# Altium PCB PCB.PcbDoc
Units mil, origin at the board's own origin, x right, y up, seen from the top; angles counter-clockwise.
Board outline 3610 x 3950 mil, 2 copper layers (Top Layer, Bottom Layer); 18 components, 15 nets, 258 pads, 0 vias.
Unrouted connection lines stored in the file: 2.
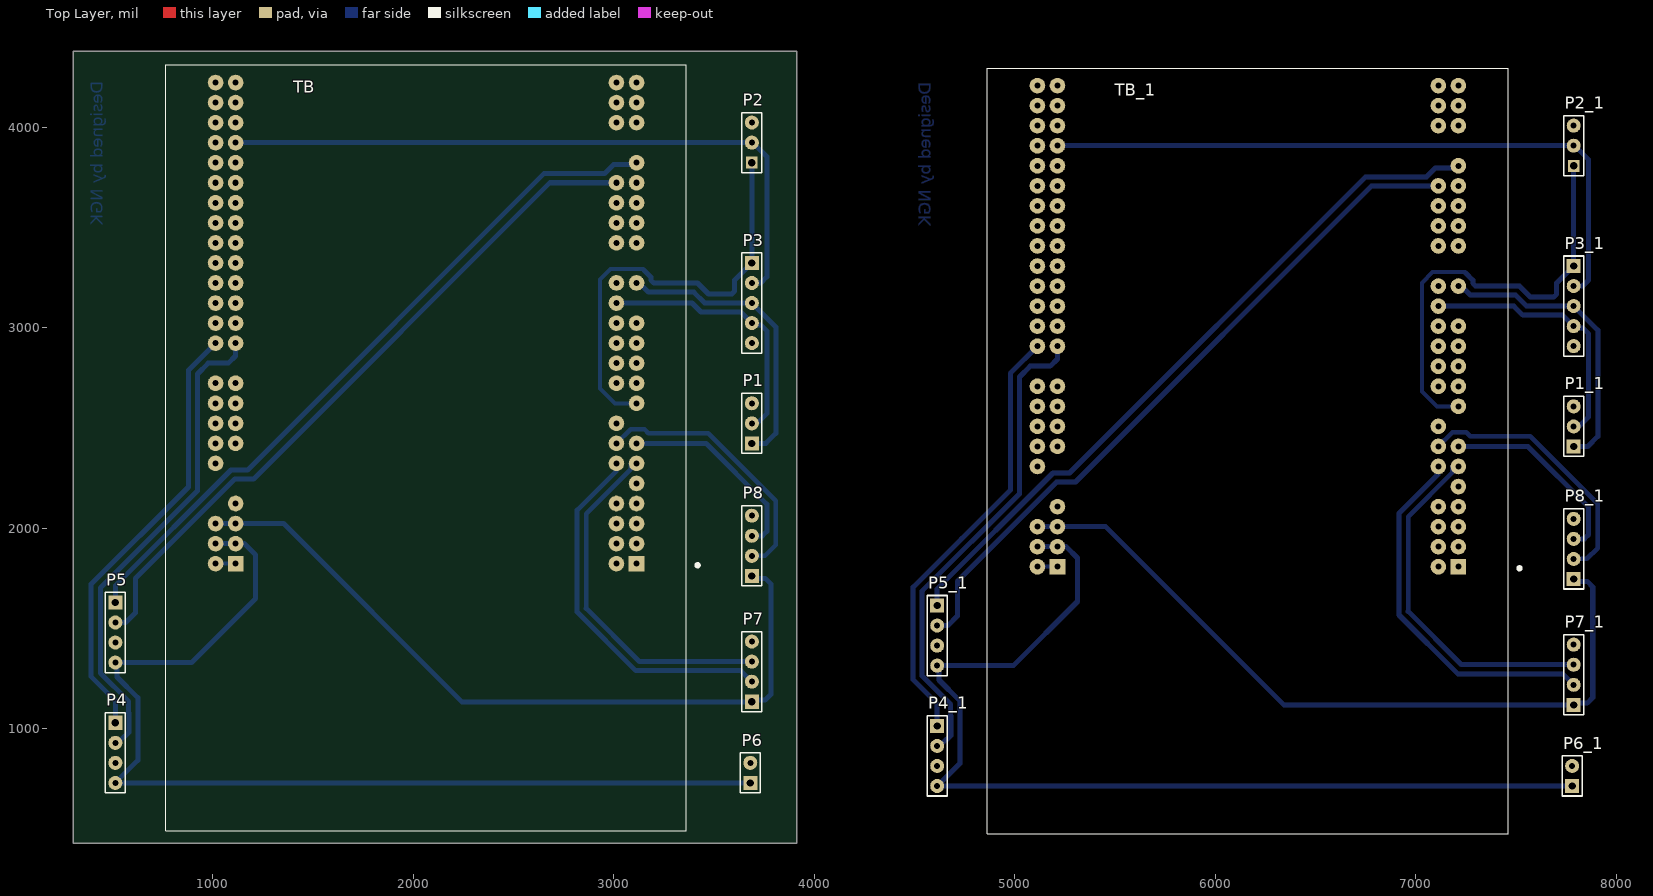
[diagram p0: Top Layer view]
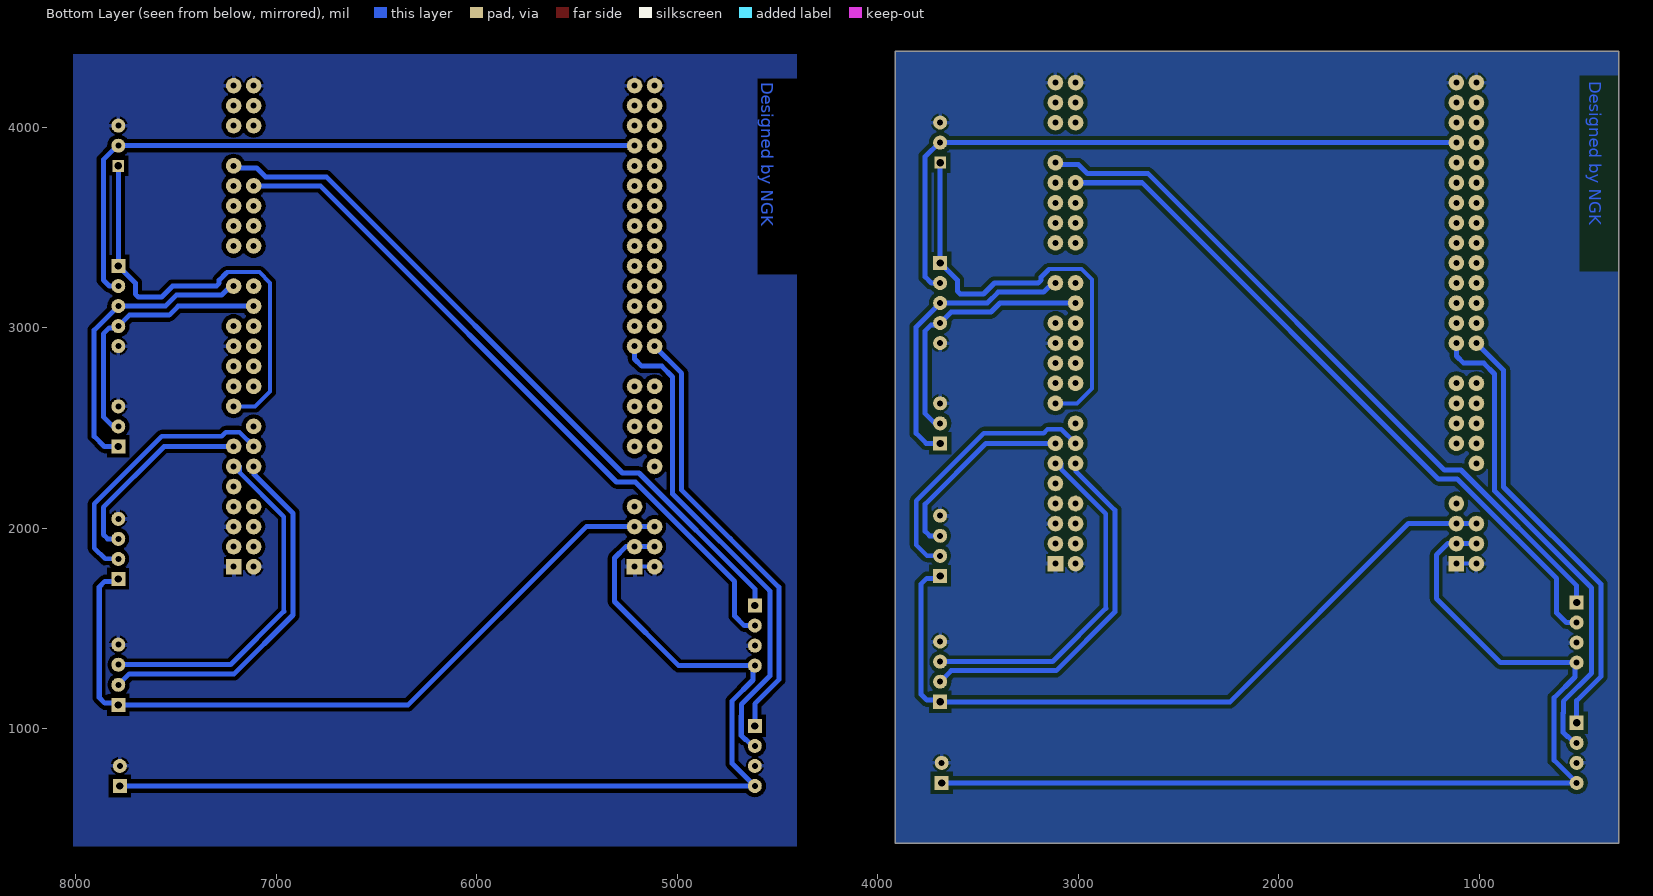
[diagram p1: Bottom Layer view, seen from below]

## Layer stack, top to bottom
Top Solder: solder mask 0.4, Solder Resist, Dk 3.5
Top Layer: signal copper 1.4
Dielectric 1: dielectric 12.6, FR-4, Dk 4.8
Bottom Layer: signal copper 1.4
Bottom Solder: solder mask 0.4, Solder Resist, Dk 3.5

## Board outline
303.18,430 303.18,4380 3913.18,4380 3913.18,430

## Design rules (kind name [scope] priority, off if disabled: settings)
Clearance [All] p1: gap=20 ignorepadtopadclearanceinfootprint=FALSE
PolygonConnect PolygonConnect_1 [All vs IsNamedPolygon('Bottom Layer-GND')] p1: thpad.connectstyle=Relief thpad.reliefconductorwidth=20 thpad.reliefentries=4 thpad.polygonreliefangle="90 Angle" thpad.airgapwidth=10 smdpad.connectstyle=Relief smdpad.reliefconductorwidth=10 smdpad.reliefentries=4 smdpad.polygonreliefangle="90 Angle" smdpad.airgapwidth=10 via.connectstyle=Relief via.reliefconductorwidth=10 via.reliefentries=4 via.polygonreliefangle="90 Angle" via.airgapwidth=10
PolygonConnect [All] p2: connectstyle=Relief reliefconductorwidth=10 reliefentries=4 polygonreliefangle="90 Angle" airgapwidth=10
RoutingVias [All] p1: holewidth=28 width=50 viastyle="Through Hole" minholewidth=28 minwidth=50 maxholewidth=28 maxwidth=50
SolderMaskExpansion [All] p1: expansion=4
Width [All] p1: maxlimit=50 minlimit=10 preferedwidth=25
30 further rules are at their usual default settings.

## Components (designator, comment, footprint, x,y, rotation, side; value= is the part's Value field where it differs from the comment)
P1 "PWM2" HDR1X3#1 3688.24,2423.76 r90 top
P1_1 "PWM2" HDR1X3#1 7788.24,2408.43 r90 top (schematic designator P1)
P2 "PWM1" HDR1X3#2 3688.24,3823.76 r90 top
P2_1 "PWM1" HDR1X3#2 7788.24,3808.43 r90 top (schematic designator P2)
P3 "PWM" HDR1X5 3688.24,3323.76 r270 top
P3_1 "PWM" HDR1X5 7788.24,3308.43 r270 top (schematic designator P3)
P4 "UART" HDR1X4 513.18,1030 r270 top
P4_1 "UART" HDR1X4 4613.18,1014.67 r270 top (schematic designator P4)
P5 "UART" HDR1X4 513.18,1630 r270 top
P5_1 "UART" HDR1X4 4613.18,1614.67 r270 top (schematic designator P5)
P6 "Header 2" HDR1X2 3680.71,730 r90 top
P6_1 "Header 2" HDR1X2 7780.71,714.67 r90 top (schematic designator P6)
P7 "ENCODER2" HDR1X4 3688.24,1134.76 r90 top
P7_1 "ENCODER2" HDR1X4 7788.24,1119.43 r90 top (schematic designator P7)
P8 "ENCODER1" HDR1X4 3688.24,1762.76 r90 top
P8_1 "ENCODER1" HDR1X4 7788.24,1747.43 r90 top (schematic designator P8)
TB "STM32F4DISCOVERY" MODULE_STM32F4DISCOVERY 2063.18,2401.71 r180 top
TB_1 "STM32F4DISCOVERY" MODULE_STM32F4DISCOVERY 6163.18,2386.39 r180 top (schematic designator TB)

## Footprints (in the part's own frame and the unit in brackets; to place one, negate y for a bottom-side part, rotate by r counter-clockwise, add the part's x,y. Pads: shape width x height; smd on the part's side, far side on the other; paste and mask are expansions set on the pad)
HDR1X2 [mil] "Connector; Header; 2 Position"
  rect 70x70 hole 35.43: 1(0,0)
  round 70 hole 30: 2(100,0)
  silkscreen extent -50,-50 150,50
HDR1X3#1 [mil] "Connector; Header; 3 Position"
  rect 70x70 hole 35.43: 1(0,0)
  round 70 hole 30: 2(100,0) 3(200,0)
  silkscreen extent -50,-50 250,50
HDR1X3#2 [mil] "Connector; Header; 3 Position"
  rect 60x59.06 hole 35.43: 1(0,0)
  round 70 hole 30: 2(100,0) 3(200,0)
  silkscreen extent -50,-50 250,50
HDR1X4 [mil] "Connector; Header; 4 Position"
  rect 70x70 hole 35.43: 1(0,0)
  round 70 hole 30: 2(100,0) 3(200,0) 4(300,0)
  silkscreen extent -50,-50 350,50
HDR1X5 [mil] "Connector; Header; 5 Position"
  rect 70x70 hole 35.43: 1(0,0)
  round 70 hole 30: 2(100,0) 3(200,0) 4(300,0) 5(400,0)
  silkscreen extent -50,-50 450,50
MODULE_STM32F4DISCOVERY [mil]
  rect 78x78 hole 30: P1_1(-1050,577.95) P2_1(950,577.95)
  round 78 hole 30: P1_2(-950,577.95) P1_3(-1050,477.95) P1_4(-950,477.95) P1_5(-1050,377.95) P1_6(-950,377.95) P1_7(-1050,277.95) P1_8(-950,277.95) P1_9(-1050,177.95) P1_11(-1050,77.95) P1_12(-950,77.95) P1_13(-1050,-22.05) P1_14(-950,-22.05) P1_16(-950,-122.05) P1_17(-1050,-222.05) P1_19(-1050,-322.05) P1_20(-950,-322.05) P1_21(-1050,-422.05) P1_22(-950,-422.05) P1_23(-1050,-522.05) P1_24(-950,-522.05) P1_25(-1050,-622.05) P1_26(-950,-622.05) P1_28(-950,-722.05) P1_29(-1050,-822.05) P1_30(-950,-822.05) P1_33(-1050,-1022.05) P1_34(-950,-1022.05) P1_35(-1050,-1122.05) P1_36(-950,-1122.05) P1_37(-1050,-1222.05) P1_38(-950,-1222.05) P1_39(-1050,-1322.05) P1_40(-950,-1322.05) P1_41(-1050,-1422.05) P1_45(-1050,-1622.05) P1_46(-950,-1622.05) P1_47(-1050,-1722.05) P1_48(-950,-1722.05) P1_49(-1050,-1822.05) P1_50(-950,-1822.05) P2_2(1050,577.95) P2_3(950,477.95) P2_4(1050,477.95) P2_5(950,377.95) P2_6(1050,377.95) P2_7(950,277.95) P2_12(1050,77.95) P2_13(950,-22.05) P2_14(1050,-22.05) P2_15(950,-122.05) P2_16(1050,-122.05) P2_17(950,-222.05) P2_18(1050,-222.05) P2_19(950,-322.05) P2_20(1050,-322.05) P2_23(950,-522.05) P2_24(1050,-522.05) P2_25(950,-622.05) P2_26(1050,-622.05) P2_27(950,-722.05) P2_28(1050,-722.05) P2_29(950,-822.05) P2_30(1050,-822.05) P2_31(950,-922.05) P2_32(1050,-922.05) P2_33(950,-1022.05) P2_34(1050,-1022.05) P2_35(950,-1122.05) P2_36(1050,-1122.05) P2_37(950,-1222.05) P2_38(1050,-1222.05) P2_39(950,-1322.05) P2_40(1050,-1322.05) P2_41(950,-1422.05) P2_42(1050,-1422.05) P2_43(950,-1522.05) P2_44(1050,-1522.05) P2_45(950,-1622.05) P2_46(1050,-1622.05) P2_47(950,-1722.05) P2_48(1050,-1722.05) P2_49(950,-1822.05) P2_50(1050,-1822.05)
  round 0 all layers, no hole: P1_10(-950,177.95) P1_15(-1050,-122.05) P1_18(-950,-222.05) P1_27(-1050,-722.05) P1_31(-1050,-922.05) P1_32(-950,-922.05) P1_42(-950,-1422.05) P1_43(-1050,-1522.05) P1_44(-950,-1522.05) P2_8(1050,277.95) P2_9(950,177.95) P2_10(1050,177.95) P2_11(950,77.95) P2_21(950,-422.05) P2_22(1050,-422.05)
  silkscreen extent -1363,-1909 1299,1909

## Part data
P1 P1_1 P2 P2_1: library part "Header 3", "Header, 3-Pin", LatestRevisionDate=17-Jul-2002, LatestRevisionNote="Re-released for DXP Platform.", Publisher="Altium Limited"
P3 P3_1: library part "Header 5", "Header, 5-Pin", LatestRevisionDate=17-Jul-2002, LatestRevisionNote="Re-released for DXP Platform.", Publisher="Altium Limited"
P4 P4_1 P5 P5_1 P7 P7_1 P8 P8_1: library part "Header 4", "Header, 4-Pin", LatestRevisionDate=17-Jul-2002, LatestRevisionNote="Re-released for DXP Platform.", Publisher="Altium Limited"
P6 P6_1: "Header, 2-Pin", LatestRevisionDate=17-Jul-2002, LatestRevisionNote="Re-released for DXP Platform.", Publisher="Altium Limited"
TB TB_1: "STM32F407VGT6 Discovery STM32F4 ARM® Cortex®-M4 MCU 32-Bit Embedded Evaluation Board", Package=None, Availability=Unavailable, MF=STMicroelectronics, MP=STM32F4DISCOVERY, Price=None, SnapEDA_Link=https://www.snapeda.com/parts/STM32F4DISCOVERY/STMicroelectronics/view-part/46335/?ref=snap

## Nets (pads, with @x,y where several pads share a name; then routed paths per layer and width w, separated by ;. In a path a pad name is that pad's centre, name@x,y a point inside that pad or via, vN(x,y) a via of type N, cw(c..) or ccw(c..) an arc to the next point about the centre after c; other vN are vias at no path point)
3V3: P7.1 P8.1 TB.P2_5 TB.P2_6 | length 3816.5
  Bottom Layer w25: TB.P2_6 TB.P2_5 1353.18,2023.76 2242.18,1134.76 P7.1 3696.57,1143.09 3755.27,1143.09 3783.18,1171 3783.18,1722.76 3755.27,1750.67 3700.33,1750.67 P8.1
5V: P4.4 P5.4 P6.1 TB.P2_3 TB.P2_4 | length 5133.6
  Bottom Layer w25: TB.P2_4 TB.P2_3 1156.18,1923.76 1213.18,1866.76 1213.18,1650 893.18,1330 P5.4 521.79,1321.39 521.79,1258.67 625.68,1154.78 625.68,842.5 P4.4 P6.1
GND: P1.3 P2.3 P3.5 P4.3 P5.3 P6.2 P7.4 P8.4 TB.P1_1 TB.P1_2 TB.P1_5 TB.P1_23 TB.P1_49 TB.P1_50 TB.P2_1 TB.P2_2 TB.P2_49 TB.P2_50 | length 100
  Bottom Layer w20: TB.P2_2 TB.P2_1
PA0: P7.2 TB.P1_12 | length 1837.6
  Bottom Layer w25: TB.P1_12 3011.42,2322 3011.42,2284.52 2817.18,2090.28 2817.18,1582.46 3109.88,1289.76 3633.24,1289.76 P7.2
PA1: P7.3 TB.P1_11 | length 1780.3
  Bottom Layer w23: 2862.18,1601.1 2862.18,2073.06 3083.68,2294.56 3083.68,2323.76 TB.P1_11
  Bottom Layer w25: 2862.18,1601.1 3128.52,1334.76 P7.3
PA2: P8.2 TB.P1_14 | length 1334.8
  Bottom Layer w23: TB.P1_14 3083.68,2494.26 3152.87,2494.26 3172.56,2474.57 3470.84,2474.57 3808.18,2137.23 3808.18,1916.83 3754.11,1862.76 P8.2
PA3: P8.3 TB.P1_13 | length 995.1
  Bottom Layer w25: TB.P1_13 3459.42,2423.76 3763.18,2120 3763.18,1984.76 3741.18,1962.76 P8.3
PA7: P2.1 P3.1 TB.P1_17 | length 2183.9
  Bottom Layer w20: TB.P1_17 3005.38,2623.76 2931.78,2697.36 2931.78,3239.94 2984.6,3292.76 3145.3,3292.76
  Bottom Layer w25: 3149.49,3288.57 3184.68,3253.38 3184.68,3237.91 3199.32,3223.26 3417.41,3223.26 3471.91,3168.76 3588.53,3168.76 3603.18,3183.41 3603.18,3238.7 P3.1 P2.1
PA8: P2.2 P3.2 TB.P2_43 | length 3366.4
  Bottom Layer w25: TB.P2_43 P2.2 3693.73,3923.76 3763.18,3854.31 3763.18,3254.19 3732.75,3223.76 P3.2
PB6: P4.2 TB.P2_23 | length 2428.9
  Bottom Layer w25: P4.2 525.36,930 557.86,962.5 561.64,962.5 580.68,981.54 580.68,1078.46 579.7,1079.45 579.7,1137.12 438.18,1278.64 438.18,1703.3 439.2,1703.3 923.18,2187.28 923.18,2770.12 976.82,2823.76 1076.94,2823.76 1113.18,2860 TB.P2_23
PB7: P4.1 TB.P2_24 | length 2200.9
  Bottom Layer w25: P4.1 513.18,1140 393.18,1260 393.18,1721.94 635.17,1963.93 636.19,1963.93 878.18,2205.92 878.18,2788.76 TB.P2_24
PD8: P5.2 TB.P1_40 | length 3509.5
  Bottom Layer w25: P5.2 565.21,1530 613.18,1577.97 613.18,1750 1109.44,2246.26 1203.31,2246.26 2680.81,3723.76 TB.P1_40
PD9: P5.1 TB.P1_41 | length 3557.7
  Bottom Layer w25: P5.1 513.18,1713.64 1090.8,2291.26 1173.18,2291.26 2650.68,3768.76 2953.89,3768.76 2998.75,3813.62 3103.04,3813.62 TB.P1_41
PE10: P1.2 P3.4 TB.P1_28 | length 1315.6
  Bottom Layer w25: TB.P1_28 3389.63,3123.76 3434.63,3078.76 3633.24,3078.76 P3.4 3696.85,3015.15 3733.21,3015.15 3763.18,2985.18 3763.18,2571.83 3715.11,2523.76 P1.2
PE11: P1.1 P3.3 TB.P1_29 | length 1456.6
  Bottom Layer w25: TB.P1_29 3127.52,3223.76 3173.02,3178.26 3398.77,3178.26 3453.27,3123.76 P3.3 3808.18,3003.82 3808.18,2474.1 3757.84,2423.76 P1.1
pads on no net: P1_1.1 P1_1.2 P1_1.3 P2_1.1 P2_1.2 P2_1.3 P3_1.1 P3_1.2 P3_1.3 P3_1.4 P3_1.5 P4_1.1 P4_1.2 P4_1.3 P4_1.4 P5_1.1 P5_1.2 P5_1.3 P5_1.4 P6_1.1 P6_1.2 P7_1.1 P7_1.2 P7_1.3 P7_1.4 P8_1.1 P8_1.2 P8_1.3 P8_1.4 TB.P1_3 TB.P1_4 TB.P1_6 TB.P1_7 TB.P1_8 TB.P1_9 TB.P1_10 TB.P1_15 TB.P1_16 TB.P1_18 TB.P1_19 TB.P1_20 TB.P1_21 TB.P1_22 TB.P1_24 TB.P1_25 TB.P1_26 TB.P1_27 TB.P1_30 TB.P1_31 TB.P1_32 TB.P1_33 TB.P1_34 TB.P1_35 TB.P1_36 TB.P1_37 TB.P1_38 TB.P1_39 TB.P1_42 TB.P1_43 TB.P1_44 TB.P1_45 TB.P1_46 TB.P1_47 TB.P1_48 TB.P2_7 TB.P2_8 TB.P2_9 TB.P2_10 TB.P2_11 TB.P2_12 TB.P2_13 TB.P2_14 TB.P2_15 TB.P2_16 TB.P2_17 TB.P2_18 TB.P2_19 TB.P2_20 TB.P2_21 TB.P2_22 TB.P2_25 TB.P2_26 TB.P2_27 TB.P2_28 TB.P2_29 TB.P2_30 TB.P2_31 TB.P2_32 TB.P2_33 TB.P2_34 TB.P2_35 TB.P2_36 TB.P2_37 TB.P2_38 TB.P2_39 TB.P2_40 TB.P2_41 TB.P2_42 TB.P2_44 TB.P2_45 TB.P2_46 TB.P2_47 TB.P2_48 TB_1.P1_1 TB_1.P1_2 TB_1.P1_3 TB_1.P1_4 TB_1.P1_5 TB_1.P1_6 TB_1.P1_7 TB_1.P1_8 TB_1.P1_9 TB_1.P1_10 TB_1.P1_11 TB_1.P1_12 TB_1.P1_13 TB_1.P1_14 TB_1.P1_15 TB_1.P1_16 TB_1.P1_17 TB_1.P1_18 TB_1.P1_19 TB_1.P1_20 TB_1.P1_21 TB_1.P1_22 TB_1.P1_23 TB_1.P1_24 TB_1.P1_25 TB_1.P1_26 TB_1.P1_27 TB_1.P1_28 TB_1.P1_29 TB_1.P1_30 TB_1.P1_31 TB_1.P1_32 TB_1.P1_33 TB_1.P1_34 TB_1.P1_35 TB_1.P1_36 TB_1.P1_37 TB_1.P1_38 TB_1.P1_39 TB_1.P1_40 TB_1.P1_41 TB_1.P1_42 TB_1.P1_43 TB_1.P1_44 TB_1.P1_45 TB_1.P1_46 TB_1.P1_47 TB_1.P1_48 TB_1.P1_49 TB_1.P1_50 TB_1.P2_1 TB_1.P2_2 TB_1.P2_3 TB_1.P2_4 TB_1.P2_5 TB_1.P2_6 TB_1.P2_7 TB_1.P2_8 TB_1.P2_9 TB_1.P2_10 TB_1.P2_11 TB_1.P2_12 TB_1.P2_13 TB_1.P2_14 TB_1.P2_15 TB_1.P2_16 TB_1.P2_17 TB_1.P2_18 TB_1.P2_19 TB_1.P2_20 TB_1.P2_21 TB_1.P2_22 TB_1.P2_23 TB_1.P2_24 TB_1.P2_25 TB_1.P2_26 TB_1.P2_27 TB_1.P2_28 TB_1.P2_29 TB_1.P2_30 TB_1.P2_31 TB_1.P2_32 TB_1.P2_33 TB_1.P2_34 TB_1.P2_35 TB_1.P2_36 TB_1.P2_37 TB_1.P2_38 TB_1.P2_39 TB_1.P2_40 TB_1.P2_41 TB_1.P2_42 TB_1.P2_43 TB_1.P2_44 TB_1.P2_45 TB_1.P2_46 TB_1.P2_47 TB_1.P2_48 TB_1.P2_49 TB_1.P2_50
copper on no net: | length 35017.4
  Bottom Layer w20: 5113.18,1808.43 5213.18,1808.43 ; 7213.18,2608.43 7105.38,2608.43 7031.78,2682.03 7031.78,3224.62 7084.6,3277.43 7245.3,3277.43
  Bottom Layer w23: 6962.18,1585.78 6962.18,2057.73 7183.68,2279.23 7183.68,2308.43 7213.18,2308.43 ; 7113.18,2408.43 7183.68,2478.93 7252.87,2478.93 7272.56,2459.24 7570.84,2459.24 7908.18,2121.9 7908.18,1901.5 7854.11,1847.43 7788.24,1847.43
  Bottom Layer w25: 4613.18,914.67 4625.36,914.67 4657.86,947.17 4661.64,947.17 4680.68,966.21 4680.68,1063.14 4679.7,1064.12 4679.7,1121.8 4538.18,1263.31 4538.18,1687.97 4539.2,1687.97 5023.18,2171.95 5023.18,2754.79 5076.82,2808.43 5176.94,2808.43 5213.18,2844.67 5213.18,2908.43 ; 4613.18,1014.67 4613.18,1124.67 4493.18,1244.67 4493.18,1706.61 4735.17,1948.6 4736.19,1948.6 4978.18,2190.59 4978.18,2773.43 5113.18,2908.43 ; 4613.18,1514.67 4665.21,1514.67 4713.18,1562.65 4713.18,1734.67 5209.44,2230.93 5303.31,2230.93 6780.81,3708.43 7113.18,3708.43 ; 4613.18,1614.67 4613.18,1698.31 5190.8,2275.93 5273.18,2275.93 6750.68,3753.43 7053.89,3753.43 7098.75,3798.29 7203.04,3798.29 7213.18,3808.43 ; 5113.18,1908.43 5213.18,1908.43 5256.18,1908.43 5313.18,1851.43 5313.18,1634.67 4993.18,1314.67 4613.18,1314.67 4621.79,1306.06 4621.79,1243.34 4725.68,1139.45 4725.68,827.17 4613.18,714.67 7780.71,714.67 ; 5113.18,2008.43 5213.18,2008.43 5453.18,2008.43 6342.18,1119.43 7788.24,1119.43 7796.57,1127.76 7855.27,1127.76 7883.18,1155.67 7883.18,1707.43 7855.27,1735.35 7800.33,1735.35 7788.24,1747.43 ; 5213.18,3908.43 7788.24,3908.43 7793.73,3908.43 7863.18,3838.98 7863.18,3238.86 7832.75,3208.43 7788.24,3208.43 ; 6962.18,1585.78 7228.52,1319.43 7788.24,1319.43 ; 7113.18,2308.43 7111.42,2306.67 7111.42,2269.2 6917.18,2074.96 6917.18,1567.14 7209.88,1274.43 7733.24,1274.43 7788.24,1219.43 ; 7113.18,3108.43 7489.63,3108.43 7534.63,3063.43 7733.24,3063.43 7788.24,3008.43 7796.85,2999.82 7833.21,2999.82 7863.18,2969.86 7863.18,2556.5 7815.11,2508.43 7788.24,2508.43 ; 7213.18,2408.43 7559.42,2408.43 7863.18,2104.67 7863.18,1969.43 7841.18,1947.43 7788.24,1947.43 ; 7213.18,3208.43 7227.52,3208.43 7273.02,3162.94 7498.77,3162.94 7553.27,3108.43 7788.24,3108.43 7908.18,2988.49 7908.18,2458.78 7857.84,2408.43 7788.24,2408.43 ; 7249.49,3273.24 7284.68,3238.05 7284.68,3222.58 7299.32,3207.94 7517.41,3207.94 7571.91,3153.43 7688.53,3153.43 7703.18,3168.08 7703.18,3223.37 7788.24,3308.43 7788.24,3808.43

## Polygon pours and split planes (outlines as drawn)
no net on Bottom Layer "Bottom Layer-GND" (solid, pour order 12): 4403.18,4364.67 8013.18,4364.67 8013.18,414.67 4403.18,414.67
GND on Bottom Layer "Bottom Layer-GND" (solid, pour order 0): 303.18,4380 3913.18,4380 3913.18,430 303.18,430

## Other copper
Bottom Layer:
  text "Designed by NGK" at 450.01,4230 h60 r90
  text "Designed by NGK" at 4580,4224.67 h60 r90

## Silkscreen, mask and mechanical layers (free items; w line width, h text height)
Drill Drawing:
  lines w10: 303.18,430 303.18,4380 3913.18,4380 3913.18,430 303.18,430 ; 4403.18,414.67 8013.18,414.67 8013.18,4364.67 4403.18,4364.67 4403.18,414.67